# Altium PCB UPCNSL-ABS-AX5043adaptor.PcbDoc
Units mm, origin at the board's own origin, x right, y up, seen from the top; angles counter-clockwise.
Board outline 74.6 x 39.6 mm, 2 copper layers (Top Layer, Bottom Layer); 4 components, 0 nets, 64 pads, 0 vias.
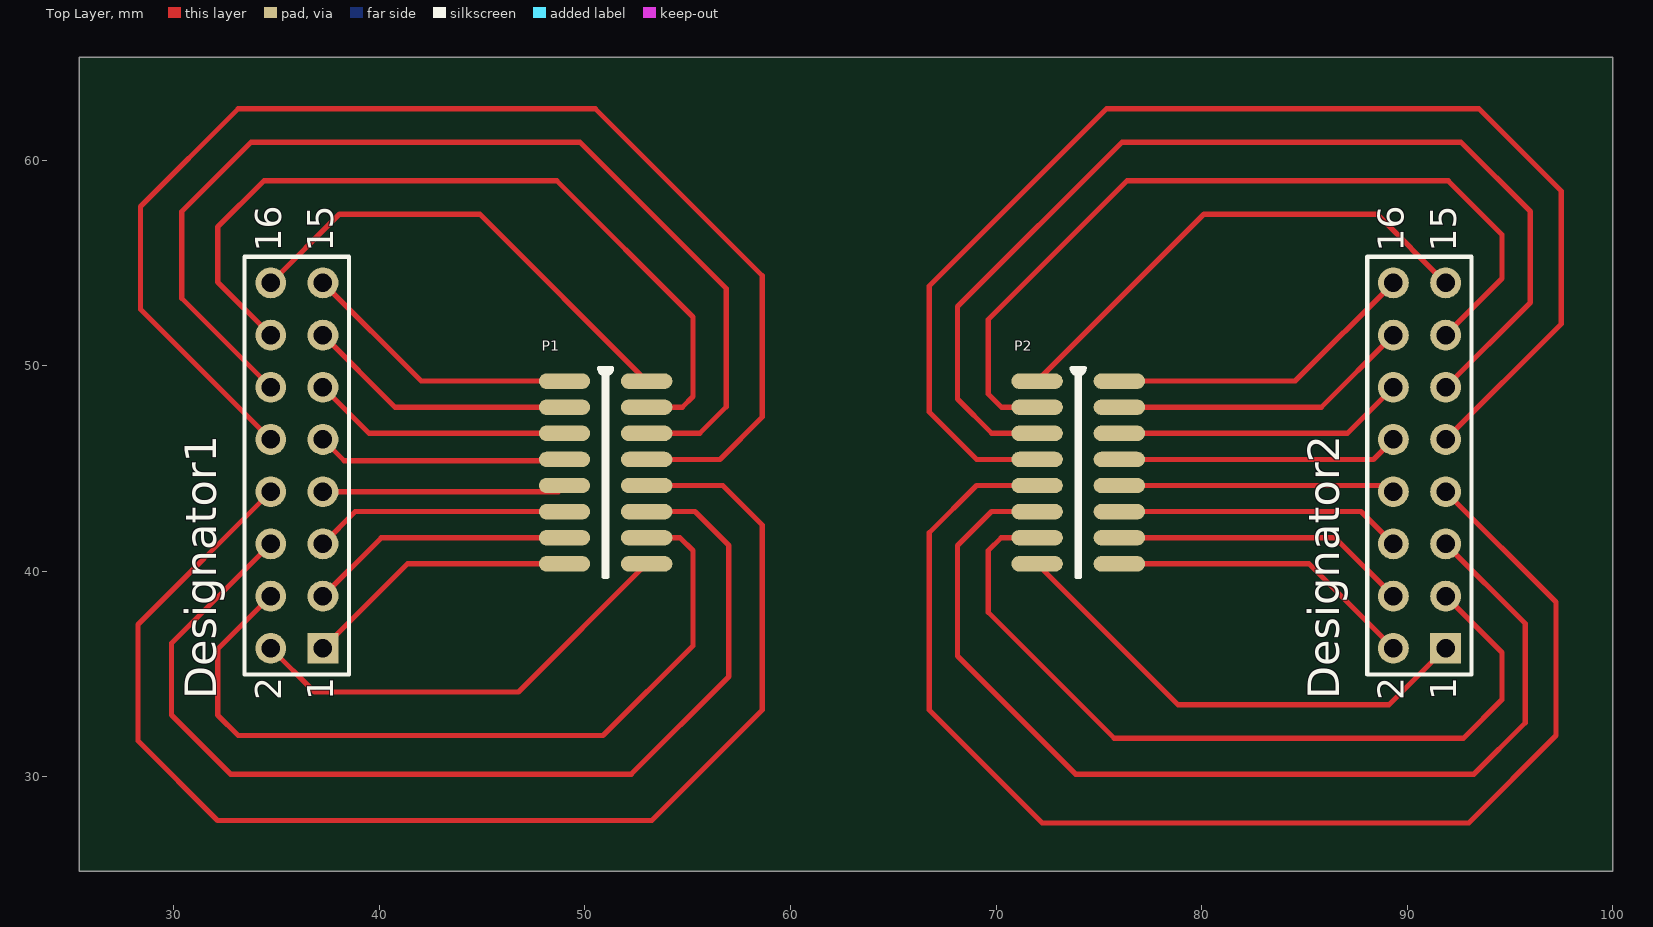
[diagram p0: Top Layer view]
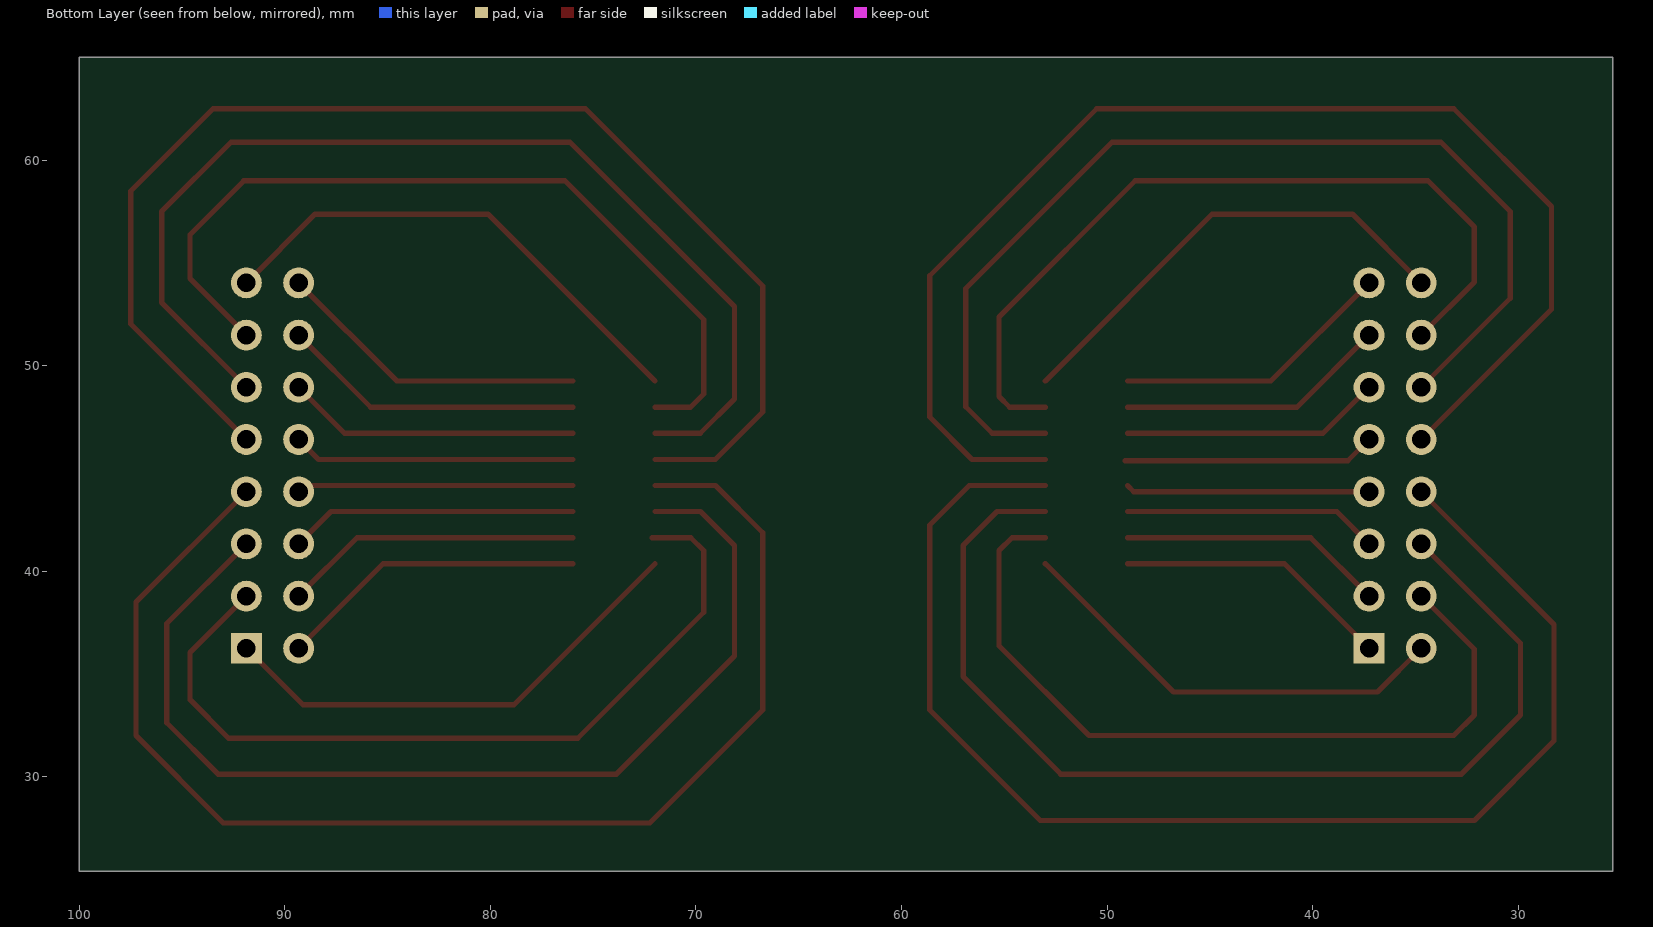
[diagram p1: Bottom Layer view, seen from below]

## Layer stack, top to bottom
Top Solder: solder mask 0.0102, Solder Resist, Dk 3.5
Top Layer: signal copper 0.0356
Dielectric 1: dielectric 0.32, FR-4, Dk 4.8
Bottom Layer: signal copper 0.0356
Bottom Solder: solder mask 0.0102, Solder Resist, Dk 3.5

## Board outline
25.4,25.4 100,25.4 100,65 25.4,65

## Design rules (kind name [scope] priority, off if disabled: settings)
Clearance [All] p1: gap=0.254
PolygonConnect [All] p1: connectstyle=Relief reliefconductorwidth=0.254 reliefentries=4 polygonreliefangle="90 Angle" airgapwidth=0.254
RoutingVias [All] p1: holewidth=0.711 width=1.27 viastyle="Through Hole" minholewidth=0.711 minwidth=1.27 maxholewidth=0.711 maxwidth=1.27
SolderMaskExpansion [All] p1: expansion=0.102
Width [All] p1: maxlimit=0.254 minlimit=0.254 preferedwidth=0.254
30 further rules are at their usual default settings.

## Components (designator, comment, footprint, x,y, rotation, side; value= is the part's Value field where it differs from the comment)
Designator1 "Comment" HDR2X8 37.25,36.25 r90 top
Designator2 "Comment" HDR2X8 91.875,36.25 r90 top
P1 "Header 8X2" "AX5043 - duplicate" 49,49.25 r0 top
P2 "Header 8X2" "AX5043 - duplicate" 72,49.25 r0 top (schematic designator P1)

## Footprints (in the part's own frame and the unit in brackets; to place one, negate y for a bottom-side part, rotate by r counter-clockwise, add the part's x,y. Pads: shape width x height; smd on the part's side, far side on the other; paste and mask are expansions set on the pad)
"AX5043 - duplicate" [mm]
  oval 2.5x0.75 smd: 1(0,0) 2(0,-1.27) 3(0,-2.54) 4(0,-3.81) 5(0,-5.08) 6(0,-6.35) 7(0,-7.62) 8(0,-8.89) 9(4,-8.89) 10(4,-7.62) 11(4,-6.35) 12(4,-5.08) 13(4,-3.81) 14(4,-2.54) 15(4,-1.27) 16(4,0)
  silkscreen extent 1.68,-9.53 2.32,0.64
HDR2X8 [mm] "Connector; Header; 8x2 Position"
  rect 1.5x1.5 hole 0.9: 1(0,0)
  round 1.5 hole 0.9: 2(0,2.54) 3(2.54,0) 4(2.54,2.54) 5(5.08,0) 6(5.08,2.54) 7(7.62,0) 8(7.62,2.54) 9(10.16,0) 10(10.16,2.54) 11(12.7,0) 12(12.7,2.54) 13(15.24,0) 14(15.24,2.54) 15(17.78,0) 16(17.78,2.54)
  silkscreen extent -1.27,-1.27 19.05,3.81

## Part data
P1 P2: "Header, 8-Pin, Dual row"

## Nets (pads, with @x,y where several pads share a name; then routed paths per layer and width w, separated by ;. In a path a pad name is that pad's centre, name@x,y a point inside that pad or via, vN(x,y) a via of type N, cw(c..) or ccw(c..) an arc to the next point about the centre after c; other vN are vias at no path point)
pads on no net: Designator1.1 Designator1.2 Designator1.3 Designator1.4 Designator1.5 Designator1.6 Designator1.7 Designator1.8 Designator1.9 Designator1.10 Designator1.11 Designator1.12 Designator1.13 Designator1.14 Designator1.15 Designator1.16 Designator2.1 Designator2.2 Designator2.3 Designator2.4 Designator2.5 Designator2.6 Designator2.7 Designator2.8 Designator2.9 Designator2.10 Designator2.11 Designator2.12 Designator2.13 Designator2.14 Designator2.15 Designator2.16 P1.1 P1.2 P1.3 P1.4 P1.5 P1.6 P1.7 P1.8 P1.9 P1.10 P1.11 P1.12 P1.13 P1.14 P1.15 P1.16 P2.1 P2.2 P2.3 P2.4 P2.5 P2.6 P2.7 P2.8 P2.9 P2.10 P2.11 P2.12 P2.13 P2.14 P2.15 P2.16
copper on no net: | length 930.9
  Top Layer w0.254: 34.71,36.25 36.835,34.125 46.765,34.125 53,40.36 ; 34.71,38.79 32.125,36.205 32.125,33 33.125,32 50.875,32 55.25,36.375 55.25,41 54.62,41.63 53,41.63 ; 34.71,41.33 29.875,36.495 29.875,33 32.75,30.125 52.25,30.125 57,34.875 57,41.25 55.35,42.9 53,42.9 ; 34.71,43.87 28.25,37.41 28.25,31.75 32.125,27.875 53.25,27.875 58.625,33.25 58.625,42.25 56.705,44.17 53,44.17 ; 34.71,46.41 28.375,52.745 28.375,57.75 33.125,62.5 50.5,62.5 58.625,54.375 58.625,47.5 56.565,45.44 53,45.44 ; 34.71,48.95 30.375,53.285 30.375,57.5 33.75,60.875 49.75,60.875 56.875,53.75 56.875,50.25 56.875,48 55.585,46.71 53,46.71 ; 34.71,51.49 32.125,54.075 32.125,56.75 34.375,59 48.625,59 55.25,52.375 55.25,48.5 54.73,47.98 53,47.98 ; 34.71,54.03 38.055,57.375 44.875,57.375 53,49.25 ; 37.25,36.25 41.36,40.36 49,40.36 ; 37.25,38.79 40.09,41.63 49,41.63 ; 37.25,41.33 38.82,42.9 49,42.9 ; 37.25,43.87 48.7,43.87 49,44.17 ; 37.25,46.41 38.285,45.375 49.125,45.375 ; 37.25,48.95 39.49,46.71 49,46.71 ; 37.25,51.49 40.76,47.98 49,47.98 ; 37.25,54.03 42.03,49.25 49,49.25 ; 72,40.36 78.86,33.5 89.125,33.5 91.875,36.25 ; 72,42.9 69.775,42.9 68.125,41.25 68.125,35.875 73.875,30.125 93.25,30.125 95.75,32.625 95.75,37.455 91.875,41.33 ; 72,44.17 69.045,44.17 66.75,41.875 66.75,33.25 72.25,27.75 93,27.75 97.25,32 97.25,38.495 91.875,43.87 ; 72,45.44 69.06,45.44 66.75,47.75 66.75,53.875 75.375,62.5 93.5,62.5 97.5,58.5 97.5,52.035 91.875,46.41 ; 72,46.71 69.79,46.71 68.125,48.375 68.125,52.875 76.125,60.875 92.625,60.875 96,57.5 96,53.075 91.875,48.95 ; 72,47.98 70.27,47.98 69.625,48.625 69.625,52.25 76.375,59 92,59 94.625,56.375 94.625,54.24 91.875,51.49 ; 72,49.25 80.125,57.375 88.53,57.375 91.875,54.03 ; 72.125,41.63 70.255,41.63 69.625,41 69.625,38 75.75,31.875 92.75,31.875 94.625,33.75 94.625,36.04 91.875,38.79 ; 76,40.36 85.225,40.36 89.335,36.25 ; 76,41.63 86.495,41.63 89.335,38.79 ; 76,42.9 87.765,42.9 89.335,41.33 ; 76,44.17 89.035,44.17 89.335,43.87 ; 76,45.44 88.365,45.44 89.335,46.41 ; 76,46.71 87.095,46.71 89.335,48.95 ; 76,47.98 85.825,47.98 89.335,51.49 ; 76,49.25 84.555,49.25 89.335,54.03

## Text inside footprints (layer, text, board x,y; h text height)
Designator1: Top Overlay "2" at 35.218,33.71 h1.27 r90; Top Overlay "1" at 37.758,33.71 h1.27 r90; Top Overlay "15" at 37.758,55.554 h1.27 r90; Top Overlay "16" at 35.218,55.554 h1.27 r90
Designator2: Top Overlay "2" at 89.843,33.71 h1.27 r90; Top Overlay "1" at 92.383,33.71 h1.27 r90; Top Overlay "15" at 92.383,55.554 h1.27 r90; Top Overlay "16" at 89.843,55.554 h1.27 r90